# EAGLE board barath pcb 2 (EAGLE 6.5.0)
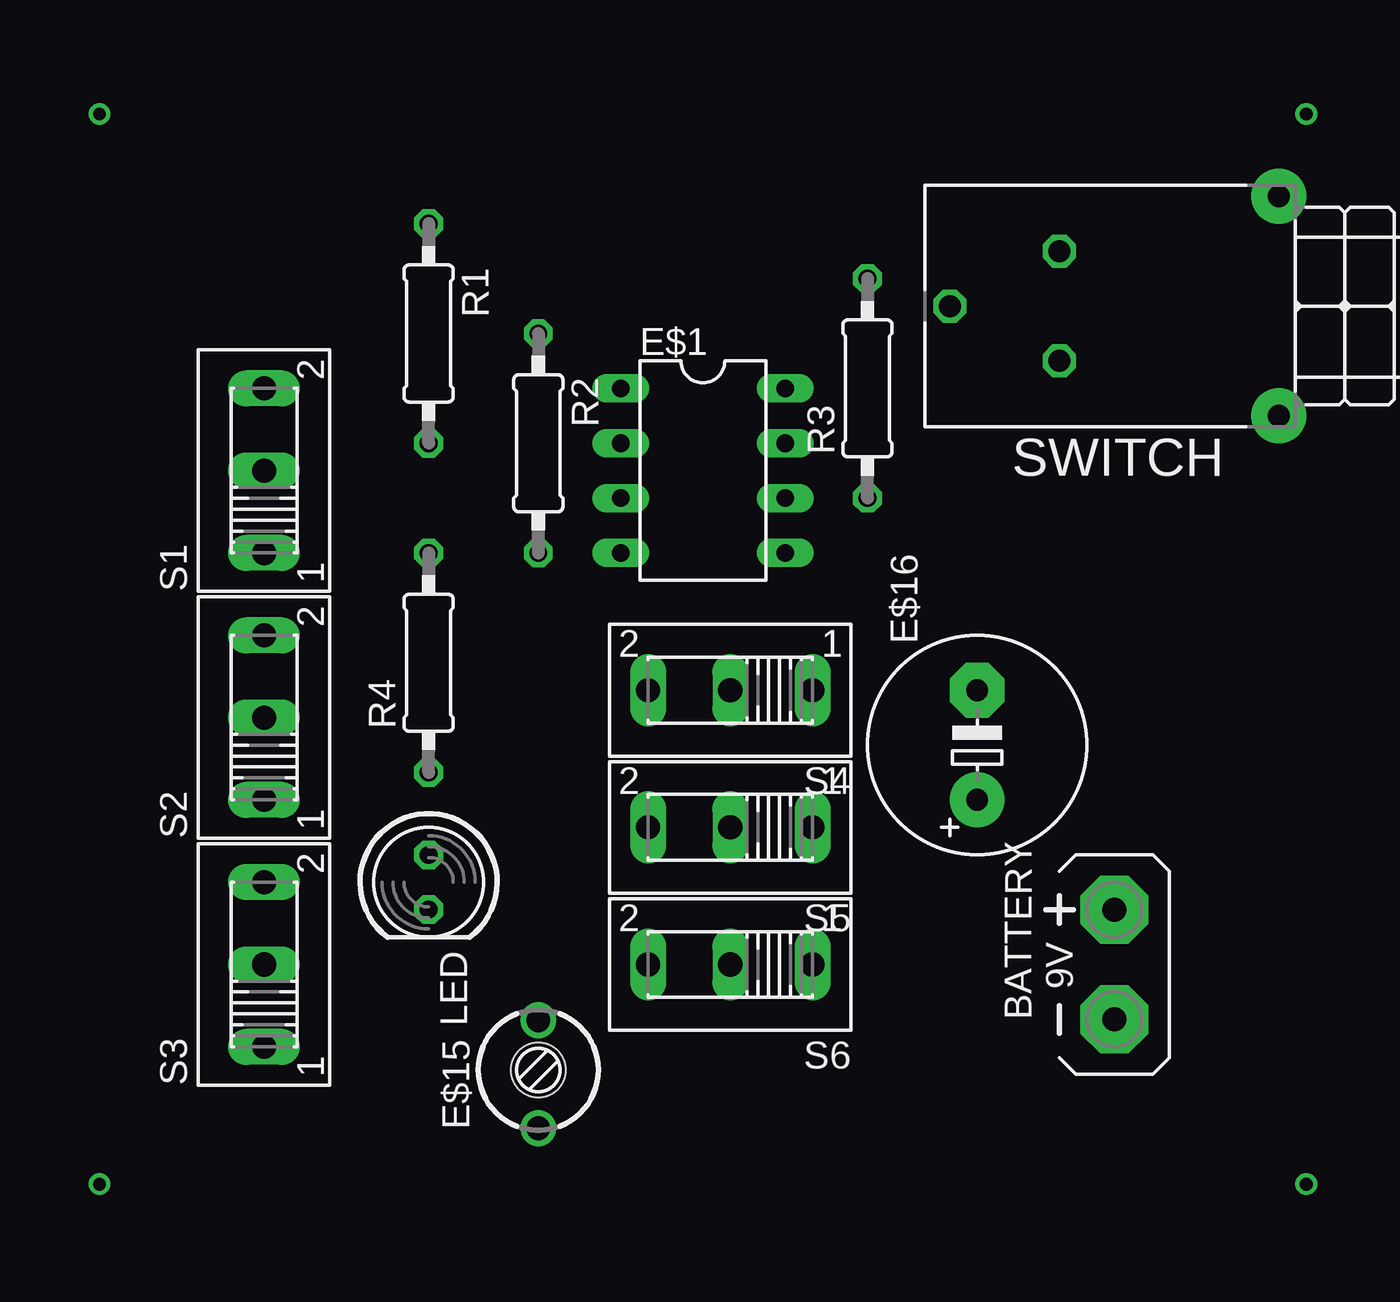
[diagram p0: board, top side]
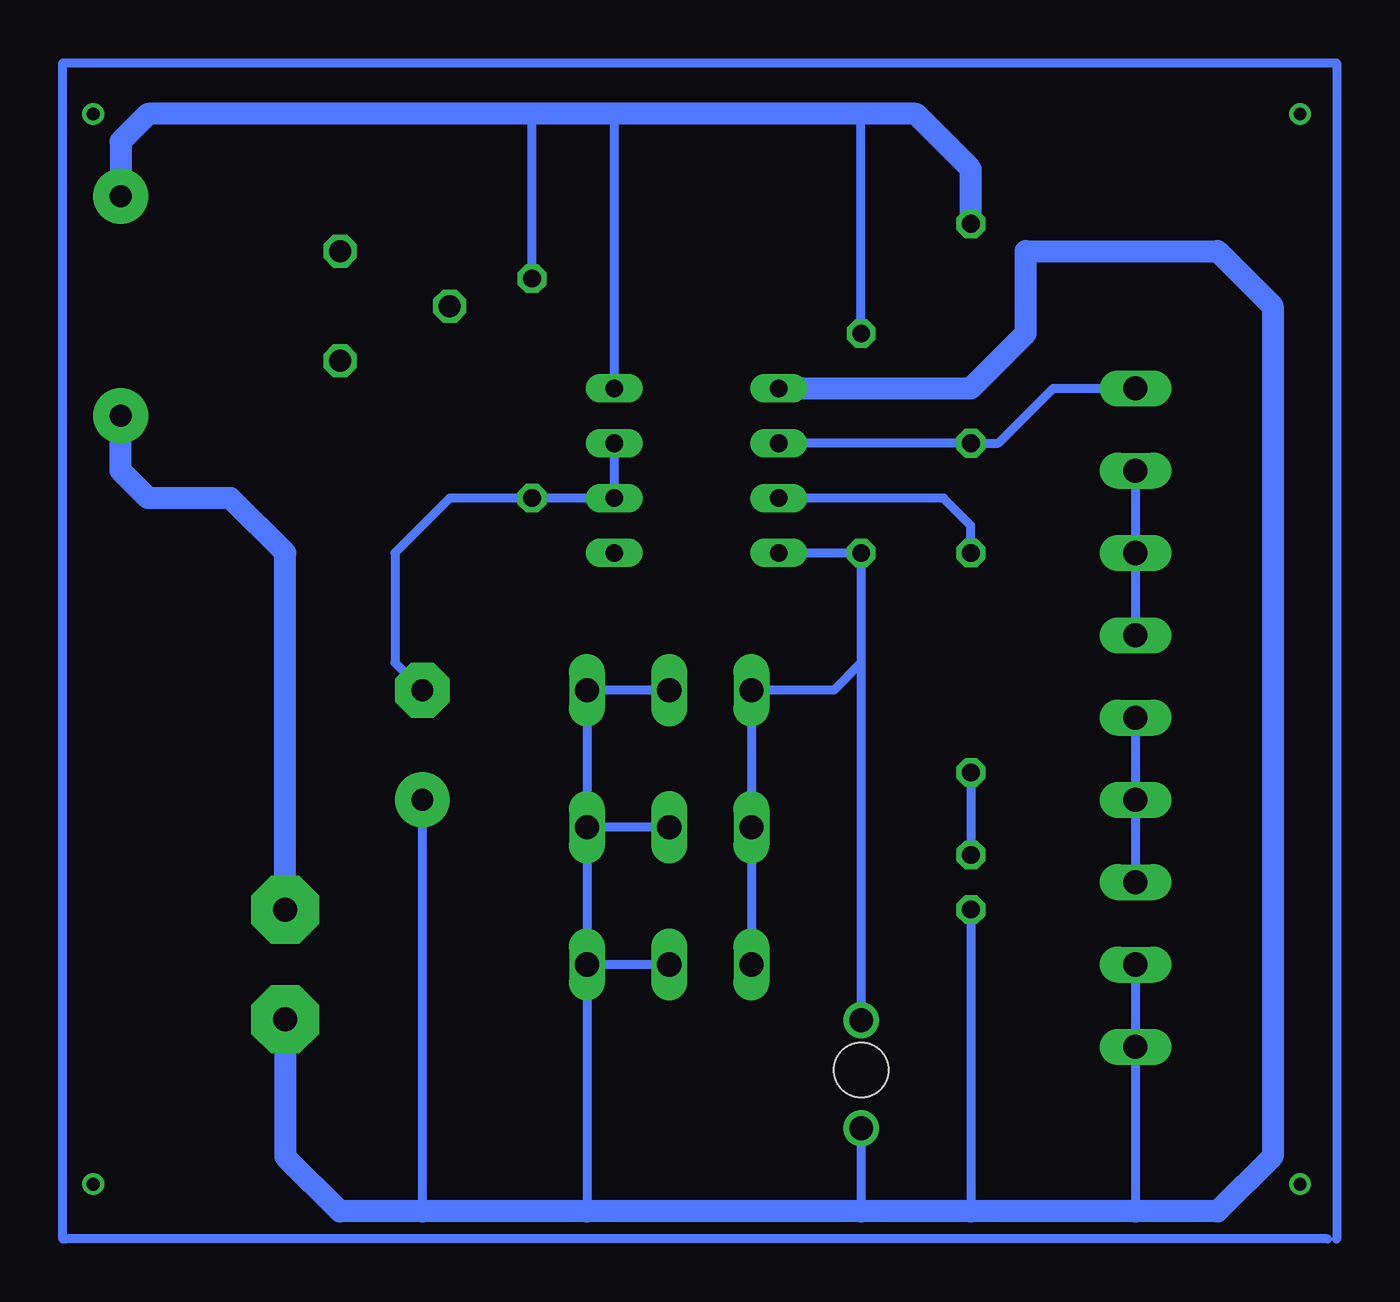
[diagram p1: board, bottom side, seen from below]

No outline drawn. Coordinates in mm, seen from the top.
Copper layers (1*16): Top 0.035mm / dielectric 1.5mm / Bottom 0.035mm
Design rules "default": minimum track width 10mil, minimum drill 24mil, track to track 8mil, track to pad 8mil, pad to pad 8mil, via to via 8mil, smd to smd 8mil, copper to edge 40mil, drill to drill 8mil, minimum pad ring 10mil, minimum via ring 8mil, stop-mask expansion 4mil, vias tented up to drill 0mil, thermal gap 10mil

## Footprints (pad centres in the part's own frame; a part is rotated, then mirrored left to right if it is on the bottom)
AB9V = drill 1.118 pad 3.15 octagon: + 0,2.54; - 0,-2.54
DIL08 = drill 0.813 long: 1 -3.81,-3.81; 2 -1.27,-3.81; 3 1.27,-3.81; 4 3.81,-3.81; 5 3.81,3.81; 6 1.27,3.81; 7 -1.27,3.81; 8 -3.81,3.81
CTRIM3050.505 = drill 1.1: 1 -2.5,0; 2 2.5,0 | hole 2.5: 0.2,0
E5-10,5 = drill 1.016 pad 2.54: + -2.54,0 | drill 1.016 pad 2.54 octagon: - 2.54,0
LED5MM = drill 0.813 octagon: A -1.27,0; K 1.27,0
0207/10 = drill 0.813 octagon: 1 -5.08,0; 2 5.08,0
255SB = drill 1.118 long: 1 -3.81,0; 2 0,0; 3 3.81,0
316-917 = drill 1.016 octagon: 1 10.16,2.54; 2 15.24,0; 3 10.16,-2.54 | drill 1.016 pad 2.54: B 0,-5.08; B1 0,5.08

## Placement (x,y rotation side)
BATTERY  [AB9V]  59.69,24.13 0 top
E$1  555  [DIL08]  40.64,46.99 270 top
E$15  0.1uf  [CTRIM3050.505]  33.02,19.05 90 top
E$16  1uf  [E5-10,5]  53.34,34.29 90 top
LED  [LED5MM]  27.94,27.94 270 top
R1  100k  [0207/10]  27.94,53.34 270 top
R2  100k  [0207/10]  33.02,48.26 270 top
R3  1M  [0207/10]  48.26,50.8 90 top
R4  470  [0207/10]  27.94,38.1 90 top
S1  [255SB]  20.32,46.99 90 top
S2  [255SB]  20.32,35.56 90 top
S3  [255SB]  20.32,24.13 90 top
S4  [255SB]  41.91,36.83 180 top
S5  [255SB]  41.91,30.48 180 top
S6  [255SB]  41.91,24.13 180 top
SWITCH  [316-917]  67.31,54.61 180 top

## Library data of the parts
BATTERY = battery
E$1 = ic-package
E$15 E$16 R1-R4 = resistor
LED = led
S1-S6 SWITCH = switch

## Nets
S1: S1.1 S1.2 S2.3
S$3: E$1.2 R1.2 S1.3
S$4: E$1.4 R2.2 S4.3 S5.3 S6.3
S$6: E$1.3 R4.2
S$7: LED.A R4.1
S$8: E$1.6 E$1.7 E$16.- R3.1
S$9: BATTERY.+ SWITCH.B1
S$10: S2.1 S2.2 S3.3
S$11: BATTERY.- E$1.1 E$16.+ LED.K S3.1 S3.2 S4.1 S4.2 S5.1 S5.2 S6.1 S6.2
S$12: E$1.8 R1.1 R2.1 R3.2 SWITCH.B

## Tracks (layer width: path | path; a pad name or v marks a point on that pad's centre or on a via)
S1
  Bottom 0.406: S1.2 S1.1 S2.3
S$1
  Bottom 0.406: 69.99,11.43 69.99,65.87 11,65.87 11,11.43
S$2
  Bottom 0.406: 11.43,11.43 69.85,11.43
S$3
  Bottom 0.406: S1.3 24.13,50.8 26.67,48.26 R1.2 E$1.2
S$4
  Bottom 0.406: E$1.4 R2.2 33.02,38.1 | 33.02,38.1 34.29,36.83 S4.3 S5.3 S6.3 | 33.02,38.1 33.02,21.59
S$6
  Bottom 0.406: R4.2 27.94,44.45 29.21,45.72 E$1.3
S$7
  Bottom 0.406: R4.1 LED.A
S$8
  Bottom 0.406: E$16.- 54.61,38.1 54.61,43.18 52.07,45.72 R3.1 E$1.6 E$1.7
S$9
  Bottom 1.016: BATTERY.+ 59.69,43.18 62.23,45.72 66.04,45.72 67.31,46.99 SWITCH.B1
S$10
  Bottom 0.406: S2.2 S2.1 S3.3
S$11
  Bottom 0.406: S3.2 S3.1 20.32,12.7 | S4.2 S4.1 S5.1 | S5.2 S5.1 | S6.2 S6.1 | S5.1 S6.1 | S6.1 45.72,12.7 | E$16.+ 53.34,12.7 | 33.02,16.51 33.02,12.7 | LED.K 27.94,12.7
  Bottom 1.016: E$1.1 27.94,50.8 25.4,53.34 25.4,57.15 16.51,57.15 13.97,54.61 13.97,15.24 16.51,12.7 20.32,12.7 27.94,12.7 33.02,12.7 45.72,12.7 53.34,12.7 57.15,12.7 59.69,15.24 BATTERY.-
S$12
  Bottom 0.406: R2.1 33.02,63.5 | R3.2 48.26,63.5 | E$1.8 44.45,63.5
  Bottom 1.016: R1.1 27.94,60.96 30.48,63.5 33.02,63.5 44.45,63.5 48.26,63.5 66.04,63.5 67.31,62.23 SWITCH.B
S$13  (via drill 0.6)
  other vias: 12.7,63.5
S$14  (via drill 0.6)
  other vias: 68.58,63.5
S$15  (via drill 0.6)
  other vias: 68.58,13.97
S$16  (via drill 0.6)
  other vias: 12.7,13.97